# Altium PCB hbridge.PcbDoc
Units mm, origin at the board's own origin, x right, y up, seen from the top; angles counter-clockwise.
Board outline 56.7 x 81.7 mm, 2 copper layers (Top Layer, Bottom Layer); 31 components, 14 nets, 111 pads, 34 vias.
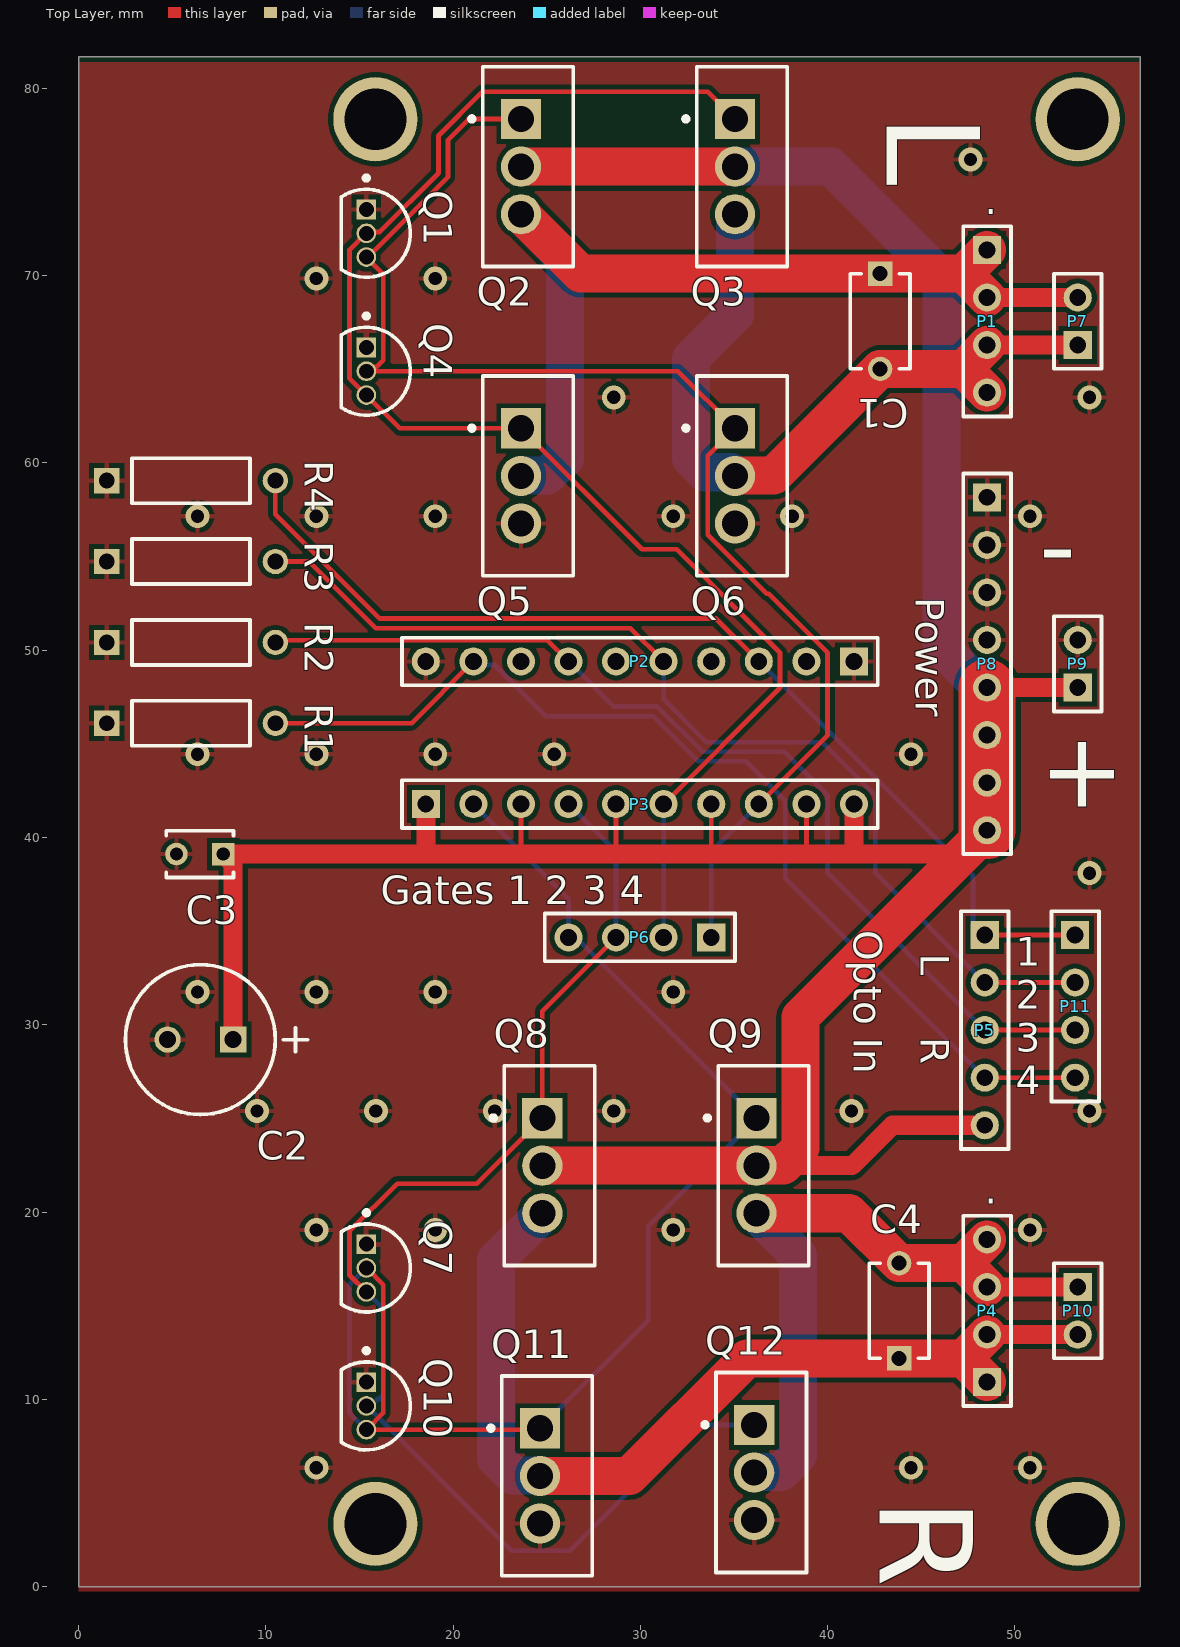
[diagram p0: Top Layer view]
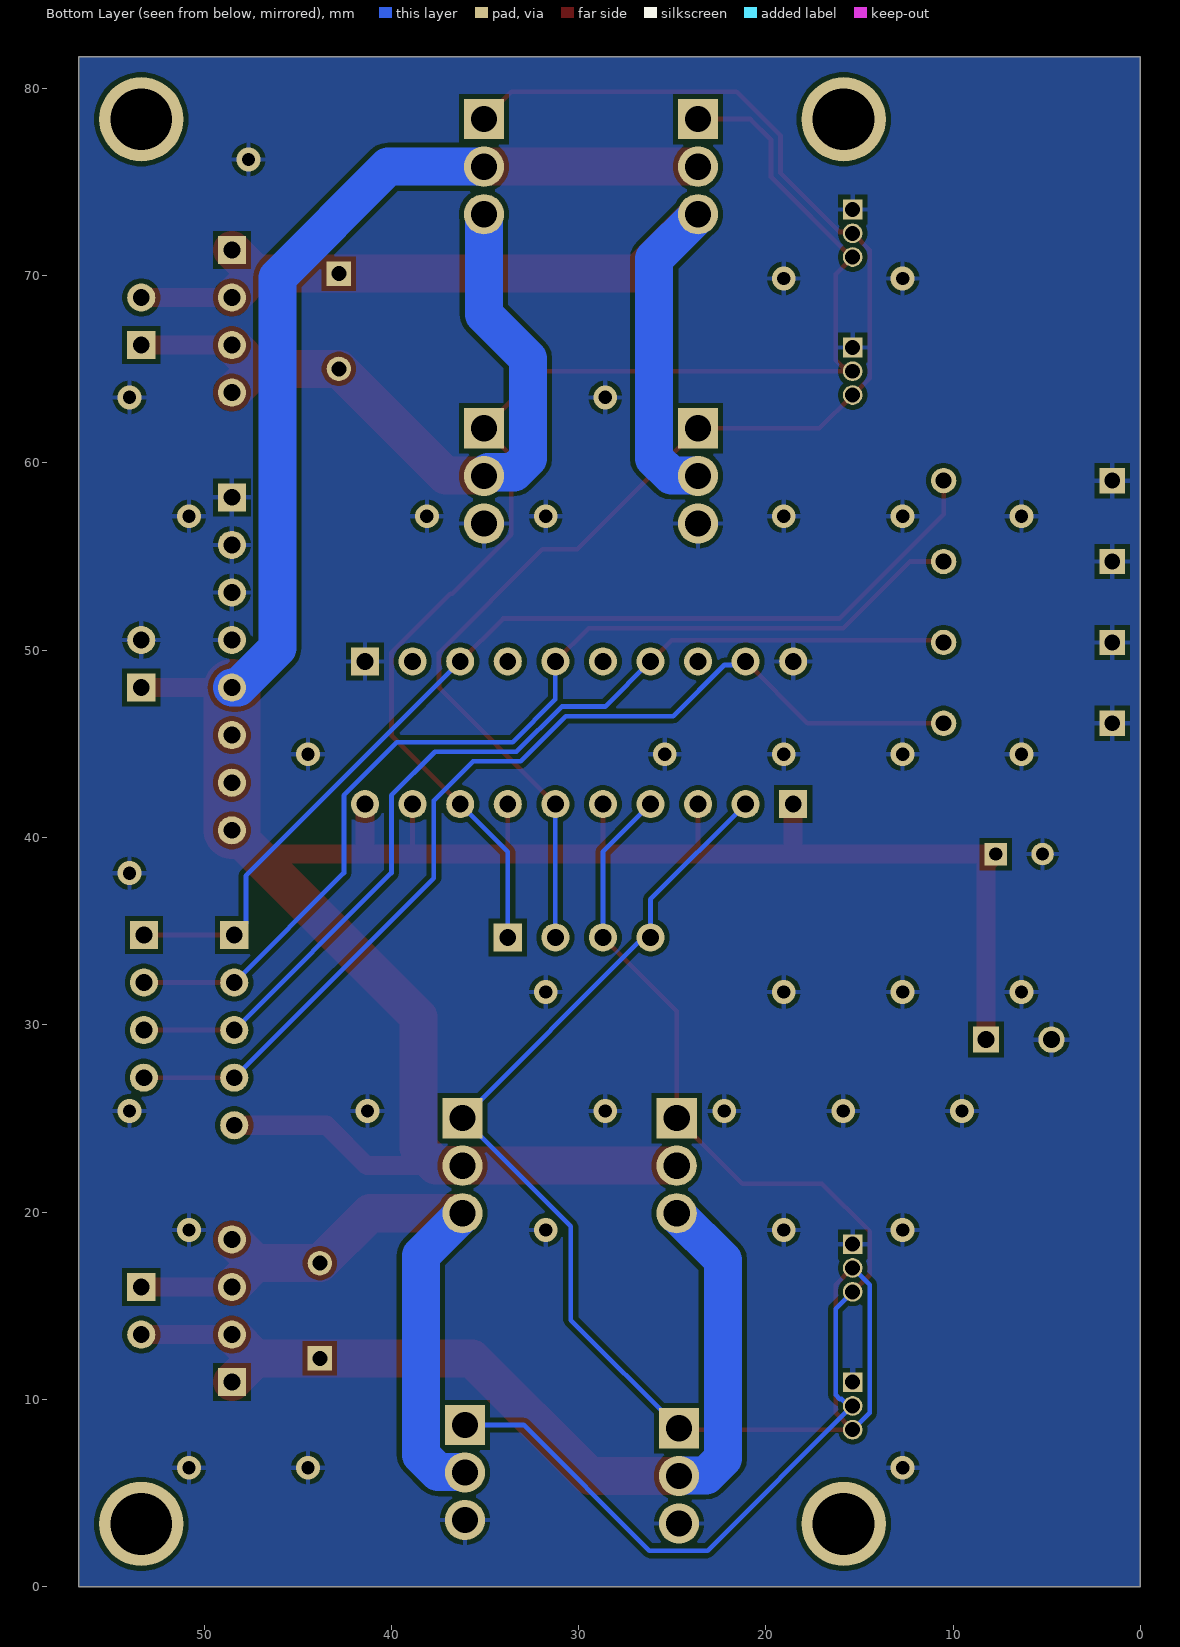
[diagram p1: Bottom Layer view, seen from below]

## Layer stack, top to bottom
Top Solder: solder mask 0.0102, Solder Resist, Dk 3.5
Top Layer: signal copper 0.0356
Dielectric 1: dielectric 0.32, FR-4, Dk 4.8
Bottom Layer: signal copper 0.0356
Bottom Solder: solder mask 0.0102, Solder Resist, Dk 3.5

## Board outline
0,0 0,81.7 56.7,81.7 56.7,0

## Design rules (kind name [scope] priority, off if disabled: settings)
Clearance [All] p1: gap=0.254 ignorepadtopadclearanceinfootprint=FALSE except(0: Arc-Hole Track-Hole SMDPad-Hole THPad-Hole Via-Hole Fill-Hole Poly-Hole Region-Hole Text-Hole)
PolygonConnect [All] p1: connectstyle=Relief reliefconductorwidth=0.254 reliefentries=4 polygonreliefangle="90 Angle" airgapwidth=0.254
RoutingVias [All] p1: holewidth=0.711 width=1.27 viastyle="Through Hole" minholewidth=0.711 minwidth=1.27 maxholewidth=0.711 maxwidth=1.27
SolderMaskExpansion [All] p1: expansion=0.102 istentingtop=FALSE
Width [All] p1: maxlimit=2.032 minlimit=0.254 preferedwidth=1.016 minimp=50.000000 maximp=50.000000 favimp=50.000000
30 further rules are at their usual default settings.

## Components (designator, comment, footprint, x,y, rotation, side; value= is the part's Value field where it differs from the comment)
C1 "C322C104K5R5TA" FP-C322C104K5R5TA-MFG 42.799,67.564 r270 top locked
C2 "ECA1HM101" CAPPR65-350-1150X800X1250 6.505,29.21 r180 top
C3 "RCE5C2A101J0DBH03A" FP-RCE0DB-MFG 6.477,39.116 r180 top
C4 "C322C104K5R5TA" FP-C322C104K5R5TA-MFG 43.815,14.732 r90 top
P1 "Header 4" HDR1X4 48.514,71.374 r270 top
P2 "Header 10" HDR1X10 41.402,49.403 r180 top
P3 "Header 10" HDR1X10 18.542,41.783 r0 top
P4 "Header 4" HDR1X4 48.514,10.922 r90 top
P5 "Header 5" HDR1X5 48.387,34.798 r270 top
P6 "Header 4" HDR1X4 33.782,34.671 r180 top
P7 "Header 2" HDR1X2 53.35,66.294 r90 top
P8 "Header 8" HDR1X8 48.514,58.166 r270 top
P9 "Header 2" HDR1X2 53.35,48.006 r90 top
P10 "Header 2" HDR1X2 53.35,16.002 r270 top
P11 "Header 4" HDR1X4 53.213,34.798 r270 top
Q1 "VN2222LLG" ONSC-TO-92-3-29-11 15.367,72.263 r270 top locked
Q2 "IRFZ44ZLPBF" FP-PG-TO262-3-MFG 23.999,75.819 r0 top locked
Q3 "IRFZ44ZLPBF" FP-PG-TO262-3-MFG 35.429,75.819 r0 top locked
Q4 "VN2222LLG" ONSC-TO-92-3-29-11 15.367,64.897 r270 top locked
Q5 "IRFZ44ZLPBF" FP-PG-TO262-3-MFG 23.999,59.309 r0 top locked
Q6 "IRFZ44ZLPBF" FP-PG-TO262-3-MFG 35.429,59.309 r0 top locked
Q7 "VN2222LLG" ONSC-TO-92-3-29-11 15.367,17.018 r270 top locked
Q8 "IRFZ44ZLPBF" FP-PG-TO262-3-MFG 25.142,22.479 r0 top locked
Q9 "IRFZ44ZLPBF" FP-PG-TO262-3-MFG 36.576,22.479 r0 top locked
Q10 "VN2222LLG" ONSC-TO-92-3-29-11 15.367,9.652 r270 top locked
Q11 "IRFZ44ZLPBF" FP-PG-TO262-3-MFG 25.015,5.916 r0 top locked
Q12 "IRFZ44ZLPBF" FP-PG-TO262-3-MFG 36.449,6.096 r0 top locked
R1 "MFR-25FBF52-1K" RESA60-630X240 6.008,46.101 r0 top
R2 "MFR-25FBF52-1K" RESA60-630X240 6.008,50.419 r0 top
R3 "MFR-25FBF52-1K" RESA60-630X240 6.008,54.737 r0 top
R4 "MFR-25FBF52-1K" RESA60-630X240 6.008,59.055 r0 top

## Footprints (in the part's own frame and the unit in brackets; to place one, negate y for a bottom-side part, rotate by r counter-clockwise, add the part's x,y. Pads: shape width x height; smd on the part's side, far side on the other; paste and mask are expansions set on the pad)
CAPPR65-350-1150X800X1250 [mm] "THD, 2-Leads, Dia 8mm, Body 11.5mm"
  rect 1.4x1.4 hole 0.9: 1(-1.75,0)
  round 1.4 hole 0.9: 2(1.75,0)
  silkscreen extent -5.71,-4 4,4, body extent -4,-4 4,4, height 12.5
FP-C322C104K5R5TA-MFG [mm]
  rect 1.3x1.3 hole 0.8 paste-1000 mask+0: 1(-2.54,0)
  round 1.3 hole 0.8 paste-1000 mask+0: 2(2.54,0)
  silkscreen extent -2.54,-1.59 2.54,1.59, body extent -3.29,-1.69 3.29,1.69, height 0.25
FP-PG-TO262-3-MFG [mm]
  rect 2.15x2.15 hole 1.4 paste-1000 mask+0: 1(-0.377,2.54)
  round 2.15 hole 1.4 paste-1000 mask+0: 2(-0.377,0) 3(-0.377,-2.54)
  silkscreen extent -3.12,-5.34 2.41,5.34, body extent -2.51,-5.44 2.51,5.44, height 0.25
FP-RCE0DB-MFG [mm]
  rect 1.2x1.2 hole 0.7 paste-1000 mask+0: 1(-1.25,0)
  round 1.2 hole 0.7 paste-1000 mask+0: 2(1.25,0)
  silkscreen extent -1.8,-1.25 1.8,1.25, body extent -1.95,-1.35 1.95,1.35, height 0.25
HDR1X2 [mm] "Connector; Header; 2 Position"
  rect 1.5x1.5 hole 0.9: 1(0,0)
  round 1.5 hole 0.9: 2(2.54,0)
  silkscreen extent -1.27,-1.27 3.81,1.27
HDR1X4 [mm] "Connector; Header; 4 Position"
  rect 1.5x1.5 hole 0.9: 1(0,0)
  round 1.5 hole 0.9: 2(2.54,0) 3(5.08,0) 4(7.62,0)
  silkscreen extent -1.27,-1.27 8.89,1.27
HDR1X5 [mm] "Connector; Header; 5 Position"
  rect 1.5x1.5 hole 0.9: 1(0,0)
  round 1.5 hole 0.9: 2(2.54,0) 3(5.08,0) 4(7.62,0) 5(10.16,0)
  silkscreen extent -1.27,-1.27 11.43,1.27
HDR1X8 [mm] "Connector; Header; 8 Position"
  rect 1.5x1.5 hole 0.9: 1(0,0)
  round 1.5 hole 0.9: 2(2.54,0) 3(5.08,0) 4(7.62,0) 5(10.16,0) 6(12.7,0) 7(15.24,0) 8(17.78,0)
  silkscreen extent -1.27,-1.27 19.05,1.27
HDR1X10 [mm] "Connector; Header; 10 Position"
  rect 1.5x1.5 hole 0.9: 1(0,0)
  round 1.5 hole 0.9: 2(2.54,0) 3(5.08,0) 4(7.62,0) 5(10.16,0) 6(12.7,0) 7(15.24,0) 8(17.78,0) 9(20.32,0) 10(22.86,0)
  silkscreen extent -1.27,-1.27 24.13,1.27
ONSC-TO-92-3-29-11 [mm] "TO, 3-Leads, Body Dia 4.7mm, Pitch 1.27mm"
  rect 1.05x1.05 hole 0.8: 1(-1.27,0)
  round 1.05 hole 0.8: 2(0,0) 3(1.27,0)
  silkscreen extent -3.07,-1.34 2.35,2.35, body extent -2.35,-1.33 2.36,2.36, height 7.87
RESA60-630X240 [mm] "Axial Resistor, 2-Leads, Dia 2.4mm, Body Length 6.3mm"
  rect 1.35x1.35 hole 0.85: 1(-4.5,0)
  round 1.35 hole 0.85: 2(4.5,0)
  silkscreen extent -3.15,-1.2 3.15,1.2, body extent -3.15,-1.2 3.15,1.2, height 2.4

## Part data
C1 C4: library part CMP-03020-034661-1, "CAP CER 0.1UF 50V X7R RADIAL", Capacitance=100nF, Case/Package=Radial, Dielectric=X7R, Dielectric Material=Ceramic, Max Operating Temperature=125°C, Min Operating Temperature=-55°C, Package Quantity=500, Tolerance=10%, Voltage=50V, Construction=RADIAL, Depth=3.18mm, Dissipation Factor=2.5%, Height=3.18mm, Height - Seated (Max)=0.26inch, Lead Diameter=0.51mm, Lead Free="Lead Free", Lead Length=7mm, Lead Pitch=5.08mm, Lead/Base Style="Formed Leads", Length=5.08mm, Material=Ceramic, Mount="Through Hole", Number of Pins=2, Packaging=Bulk, Radiation Hardening=No, REACH SVHC="No SVHC", RoHS Compliant=Yes, Series="Golden Max™", Termination=Radial, Voltage Rating=50V, Voltage Rating (DC)=50V, Weight=0.0625lb, Width=0.125inch
C2: library part CMP-1665-00042-2, "Aluminum Electrolytic Capacitor, 100 uF, +/- 20%, 50 V, -40 to 85 degC, 2-Pin THD, RoHS, Bulk", Capacitance=100uF, Case/Package=Radial, Dielectric Material=Aluminium, Leakage Current=3uA, Manufacturer=Panasonic, Max Operating Temperature=85degC, Min Operating Temperature=-40degC, Package Description="2-Pin Radial Lead, Dia 8 mm, Height 12.5 mm", Package Quantity=200, Package Reference=CAPPR65-350-1150X800X1250, Ripple Current=250mA, Tolerance=20%, Voltage=50V, Datasheet URL=https://industrial.panasonic.com/cdbs/www-data/pdf/RDF0000/ABA0000C1218.pdf, Datasheet Version="Rev. 05, 10/2016", Diameter=8mm, Dissipation Factor=0.12%, Height=11.5mm, Height - Seated (Max)=0.492inch, Lead Diameter=0.6mm, Lead Free=LeadFree, Lead Pitch=3.5mm, Lead/Base Style=Straight, Length=11.5mm, Life (Hours)=2000Hour, Manufacturer URL=http://www.panasonic.com/, Mount=ThroughHole, Number of Pins=2, Packaging=Bulk, Polarity=Polar, Radiation Hardening=No, REACH SVHC=NoSVHC, Ripple Current (AC)=250mA, RoHSCompliant=true, Termination=Radial, Voltage Rating=50V, Voltage Rating (DC)=50V
C3: library part CMP-06035-022164-1, "Cap Ceramic 100pF 100V C0G ±5% Radial 2.5mm +125°C Ammo Pack", Capacitance=100pF, Case/Package=Radial, Dielectric=C0G, Max Operating Temperature=125°C, Min Operating Temperature=-55°C, Package Quantity=2000, Ratings=AEC-Q200, Resistor Type=Ceramic, Tolerance=5%, Voltage Rating=100V, Height=3.5mm, Height - Seated (Max)=0.138inch, Lead Diameter=0.5mm, Lead Pitch=0.098inch, Lead/Base Style=Straight, Length=0.142inch, Mount="Through Hole", Packaging="Tape and Reel", Termination=Radial, Voltage Rating (DC)=100V, Width=0.098inch
P1 P4 P6 P11: "Header, 4-Pin", LatestRevisionDate=17-Jul-2002, LatestRevisionNote="Re-released for DXP Platform.", Publisher="Altium Limited"
P2 P3: "Header, 10-Pin", LatestRevisionDate=17-Jul-2002, LatestRevisionNote="Re-released for DXP Platform.", Publisher="Altium Limited"
P5: "Header, 5-Pin", LatestRevisionDate=17-Jul-2002, LatestRevisionNote="Re-released for DXP Platform.", Publisher="Altium Limited"
P7 P9 P10: "Header, 2-Pin", LatestRevisionDate=17-Jul-2002, LatestRevisionNote="Re-released for DXP Platform.", Publisher="Altium Limited"
P8: "Header, 8-Pin", LatestRevisionDate=17-Jul-2002, LatestRevisionNote="Re-released for DXP Platform.", Publisher="Altium Limited"
Q1 Q4 Q7 Q10: library part CMP-1058-00930-1, "Small Signal MOSFET, 150 mA, 60 V, N-Channel, 3-Pin TO-92, Pb-Free, Bulk Box", Manufacturer="On Semiconductor", Package Type=TO-92, Channel Polarity="N Channel", ComponentLink1Description="Manufacturer URL", ComponentLink1URL=http://www.onsemi.com/, ComponentLink2Description=Datasheet, ComponentLink2URL=http://www.onsemi.com/pub_link/Collateral/VN2222LL-D.PDF, ComponentLink3Description="Package Specification", ComponentLink3URL=http://www.onsemi.cn/pub_link/Collateral/2N6426-D.PDF, Configuration=Single, DatasheetVersion="Rev. 4", ID Max (A)=0.15, Mounting Technology="Through Hole", PackageDescription="3-Pin Transistor Outline, Body 4.825 x 3.685 mm, Pitch 1.27 mm", PackageReference=TO-92-3-29-11_AM_SL, PackageVersion="Rev. AM", Packing="Bulk Box", PartNumber=VN2222LLG, PD Max (W)=0.4, RoHS=Pb-Free, V(BR)DSS Min (V)=60, VGS Max (V)=20, VGS(th) Max (V)=2.5
Q2 Q3 Q5 Q6 Q8 Q9 Q11 Q12: library part CMP-32901-000428-1, "MOSFET N-CH 55V 51A TO262", Case/Package=TO-262, Continuous Drain Current (ID)=51A, Drain to Source Resistance=13.9mR, Drain to Source Voltage (Vdss)=55V, Gate to Source Voltage (Vgs)=20V, Input Capacitance=1.42nF, Max Operating Temperature=175°C, Max Power Dissipation=80W, Min Operating Temperature=-55°C, Element Configuration=Single, Halogen Free="Halogen Free", Height=0.355inch, Lead Free="Contains Lead", Length=0.419inch, Max Dual Supply Voltage=55V, Mount="Through Hole", Number of Pins=3, Packaging=Rail/Tube, Power Dissipation=80W, Rds On Max=13.9mR, RoHS Compliant=Yes, Turn-Off Delay Time=33ns, Turn-On Delay Time=14ns, Width=0.19inch
R1 R2 R3 R4: library part CMP-1659-00075-1, "Axial Resistor, 1 KOhm, +/- 1%, 250 mW, -55 to 155 degC, 2-Pin THD, RoHS, Bulk", Case\Package=Axial, Max Operating Temperature="155 degC", Min Operating Temperature="-55 degC", Package Quantity=200, Power Rating="250 mW", Resistance="10 kohm", Tolerance=1%, Voltage Rating="250 V", ComponentLink1Description="Manufacturer URL", ComponentLink1URL=http://www.yageo.com/, ComponentLink2Description=Datasheet, ComponentLink2URL=http://www.yageo.com/documents/recent/Yageo%20LR_MFR_2013.pdf, DatasheetVersion=Apr-13, Length="0.248 inch", PackageDescription="2-Pin Axial Lead, Dia 2.4 mm, Body Length 6.3 mm", PackageReference=MFR-25, Packaging=Bulk, RoHSCompliant=true

## Free pads (board coordinates)
  round 4.5 hole 3.3: 12(15.85,3.35) 12(15.85,78.35) 13(53.35,3.35) 13(53.35,78.35)

## Via types
v1: diameter 1.27, hole 0.711, Top Layer to Bottom Layer, tented both sides, 34 vias

## Nets (pads, with @x,y where several pads share a name; then routed paths per layer and width w, separated by ;. In a path a pad name is that pad's centre, name@x,y a point inside that pad or via, vN(x,y) a via of type N, cw(c..) or ccw(c..) an arc to the next point about the centre after c; other vN are vias at no path point)
15V: C2.1 C3.1 P3.1 P3.3 P3.5 P3.7 P3.9 P3.10 P5.5 P8.5 P8.6 P8.7 P8.8 P9.1 Q2.2 Q3.2 Q8.2 Q9.2 | length 176.4
  Top Layer w0.254: 23.622,39.116 P3.3 ; 28.702,39.116 P3.5 ; 33.782,39.116 P3.7 ; 38.862,39.116 P3.9
  Top Layer w1.016: C2.1 8.255,38.588 C3.1 18.415,39.116 ; P3.1 18.542,39.243 18.415,39.116 ; Q9.2 41.301,22.479 43.46,24.638 P5.5 ; P3.10 41.402,39.116 ; P8.7@48.383,42.926 P8.7 ; P8.8 48.383,40.386 47.113,39.116 41.402,39.116 ; P8.5 P9.1 ; 18.415,39.116 23.622,39.116 28.702,39.116 33.782,39.116 38.862,39.116 41.402,39.116
  Top Layer w2.032: Q2.2 Q3.2 ; Q8.2 Q9.2 36.221,22.502 37.627,22.502 38.544,23.418 38.544,30.416 P8.8
  Top Layer w3.048: P8.8 P8.7 P8.6 P8.5
  Bottom Layer w2.032: Q3.2 40.18,75.819 46.086,69.913 46.086,50.117 48.197,48.006 P8.5
Gate1: P3.8 P6.1 Q1.3 Q2.1 Q4.2 Q6.1 | length 73.3
  Top Layer w0.254: Q4.2 Q4.2@15.686,64.897 ; Q2.1 20.828,78.359 19.728,77.259 19.728,75.27 15.45,70.993 Q1.3 16.273,70.087 16.273,65.484 16.05,65.261 15.913,65.124 15.81,65.124 15.686,65 Q4.2@15.686,64.897 ; P3.8 39.993,45.454 39.993,49.871 36.846,53.019 36.743,53.019 33.596,56.166 33.596,60.393 Q6.1 32.004,64.897 Q4.2@15.686,64.897
  Bottom Layer w0.254: P6.1 33.782,39.243 P3.8
Gate2: P3.6 P6.2 Q1.2 Q3.1 Q4.3 Q5.1 | length 79.5
  Top Layer w0.254: P3.6 37.453,47.994 37.453,49.871 31.938,55.386 30.085,55.386 Q5.1 17.145,61.849 Q4.3 15.356,63.627 14.461,64.522 14.461,71.368 15.425,72.332 16.071,72.332 19.22,75.481 19.22,77.469 21.566,79.815 33.596,79.815 Q3.1
  Bottom Layer w0.254: P6.2 P3.6
Gate3: P3.4 P6.3 Q7.3 Q8.1 Q10.2 Q12.1 | length 69.6
  Top Layer w0.254: Q7.3 15.356,15.748 14.461,16.643 14.461,18.971 17.011,21.521 21.267,21.521 Q8.1 24.765,30.734 P6.3
  Bottom Layer w0.254: Q10.2 Q10.2@15.378,9.652 ; Q7.3 16.273,14.842 16.273,10.239 16.05,10.016 15.946,10.016 15.582,9.652 Q10.2@15.378,9.652 ; P3.4 28.702,39.243 P6.3 ; Q12.1 32.937,8.636 26.221,1.92 23.11,1.92 Q10.2@15.378,9.652
Gate4: P3.2 P6.4 Q7.2 Q9.1 Q10.3 Q11.1 | length 72.7
  Top Layer w0.254: Q10.3 Q10.3@15.378,8.382 ; Q7.2 15.378,17.018 16.273,16.123 16.273,9.277 Q10.3@15.378,8.382 ; Q11.1 24.564,8.382 Q10.3@15.378,8.382
  Bottom Layer w0.254: Q10.3 15.356,8.382 14.461,9.277 14.461,16.123 15.356,17.018 Q7.2 ; P3.2 26.162,36.703 P6.4 26.4,34.433 26.785,34.433 Q9.1 30.418,19.239 30.418,14.236 Q11.1
GND: C2.2 C3.2 P2.1 P2.10 P8.1 P8.2 P8.3 P8.4 P9.2 Q1.1 Q4.1 Q5.3 Q6.3 Q7.1 Q10.1 Q11.3 Q12.3 R1.1 R2.1 R3.1 R4.1
  other v1: 12.7,6.35 44.45,6.35 50.8,6.35 12.7,19.05 19.05,19.05 31.75,19.05 50.8,19.05 9.525,25.4 15.875,25.4 22.225,25.4 28.575,25.4 41.275,25.4 53.975,25.4 6.35,31.75 12.7,31.75 19.05,31.75 31.75,31.75 53.975,38.1 6.35,44.45 12.7,44.45 19.05,44.45 25.4,44.45 44.45,44.45 6.35,57.15 12.7,57.15 19.05,57.15 31.75,57.15 38.1,57.15 50.8,57.15 28.575,63.5 53.975,63.5 12.7,69.85 19.05,69.85 47.625,76.2
In1: P2.3 P5.1 P11.1 R4.2 | length 55.3
  Top Layer w0.254: R4.2 10.508,57.267 16.085,51.689 34.036,51.689 P2.3 ; P5.1 P11.1
  Bottom Layer w0.254: P2.3 47.764,37.961 47.764,35.421 P5.1
In2: P2.5 P5.2 P11.2 R3.2 | length 55.6
  Top Layer w0.254: R3.2 12.319,54.737 15.875,51.181 29.464,51.181 P2.5 ; P5.2 P11.2
  Bottom Layer w0.254: P2.5 31.242,47.371 33.528,45.085 39.699,45.085 42.533,42.251 42.533,38.112 P5.2
In3: P2.7 P5.3 P11.3 R2.2 | length 53.8
  Top Layer w0.254: R2.2 10.623,50.534 25.031,50.534 P2.7 ; P5.3 P11.3
  Bottom Layer w0.254: P2.7 28.575,46.99 30.905,46.99 33.318,44.577 37.667,44.577 39.993,42.251 39.993,38.112 P5.3
In4: P2.9 P5.4 P11.4 R1.2 | length 55.7
  Top Layer w0.254: R1.2 17.78,46.101 P2.9 ; P5.4 P11.4
  Bottom Layer w0.254: P2.9 21.272,49.213 22.213,49.213 24.944,46.482 30.682,46.482 33.095,44.069 35.635,44.069 37.731,41.973 37.731,37.834 P5.4
NetC1_1: C1.1 P1.1 P1.2 P7.2 Q2.3 Q5.2 | length 50.1
  Top Layer w1.016: P1.2 P7.2
  Top Layer w2.032: Q2.3 26.797,70.104 C1.1 47.244,70.104 ; P1.2 47.244,70.104 ; P1.1 47.244,70.104
  Bottom Layer w2.032: Q5.2 23.645,59.332 25.051,59.332 25.967,60.248 25.967,70.902 23.622,73.247 Q2.3
NetC1_2: C1.2 P1.3 P1.4 P7.1 Q3.3 Q6.2 | length 39.7
  Top Layer w1.016: P1.3 P7.1
  Top Layer w2.032: Q6.2 35.075,59.332 37.107,59.332 C1.2 47.244,65.024 ; P1.4 47.244,65.024 ; P1.3 47.244,65.024
  Bottom Layer w2.032: Q6.2 35.02,59.309 34.825,59.504 33.451,59.504 32.707,60.248 32.707,65.575 35.052,67.92 Q3.3
NetC4_1: C4.1 P4.1 P4.2 P10.2 Q8.3 Q11.2 | length 50.5
  Top Layer w1.016: P4.2 P10.2
  Top Layer w2.032: Q11.2 29.405,5.916 35.681,12.192 C4.1 47.244,12.192 ; P4.1 47.244,12.192 ; P4.2 47.244,12.192
  Bottom Layer w2.032: Q11.2 24.615,5.939 23.209,5.939 22.293,6.855 22.293,17.435 24.765,19.907 Q8.3
NetC4_2: C4.2 P4.3 P4.4 P10.1 Q9.3 Q12.2 | length 37.1
  Top Layer w1.016: P4.3 P10.1
  Top Layer w2.032: Q9.3 41.148,19.939 C4.2 47.244,17.272 ; P4.3 47.244,17.272 ; P4.4 47.244,17.272
  Bottom Layer w2.032: Q12.2 36.094,6.119 37.5,6.119 38.417,7.035 38.417,17.689 36.199,19.907 Q9.3
pads on no net: P2.2 P2.4 P2.6 P2.8

## Polygon pours and split planes (outlines as drawn)
GND on Bottom Layer "GND_L02_P000" (solid, remove dead copper, pour order 0): 56.642,0 56.642,81.661 0,81.661 0,0
GND on Top Layer "GND_L01_P001" (solid, remove dead copper, pour order 1): 56.642,-0.254 56.642,81.407 0,81.407 0,-0.254

## Silkscreen, mask and mechanical layers (free items; w line width, h text height)
Top Overlay:
  text "L" at 43.164,78.629 h5 r270
  text "." at 48.387,73.279 h1.52
  text "Power" at 44.704,52.832 h1.52 r270
  text "- /  / +" at 51.308,41.656 h4
  text "Gates 1 2 3 4" at 16.129,36.449 h1.52
  text "Opto In" at 41.402,35.052 h1.52 r270
  text "L" at 44.958,33.782 h1.52 r270
  text "R" at 44.958,29.337 h1.52 r270
  text "1 / 2 / 3 / 4" at 50.038,26.289 h1.52
  text "." at 48.387,20.447 h1.52
  text "R" at 42.783,4.715 h5 r270
Mechanical 1:
  the board outline again, w0.254